# Altium PCB 门内主板.PcbDoc
Units mil, origin at the board's own origin, x right, y up, seen from the top; angles counter-clockwise.
Board outline 3940 x 3935 mil, 2 copper layers (Top Layer, Bottom Layer); 82 components, 98 nets, 427 pads, 219 vias.
Unrouted connection lines stored in the file: 51.
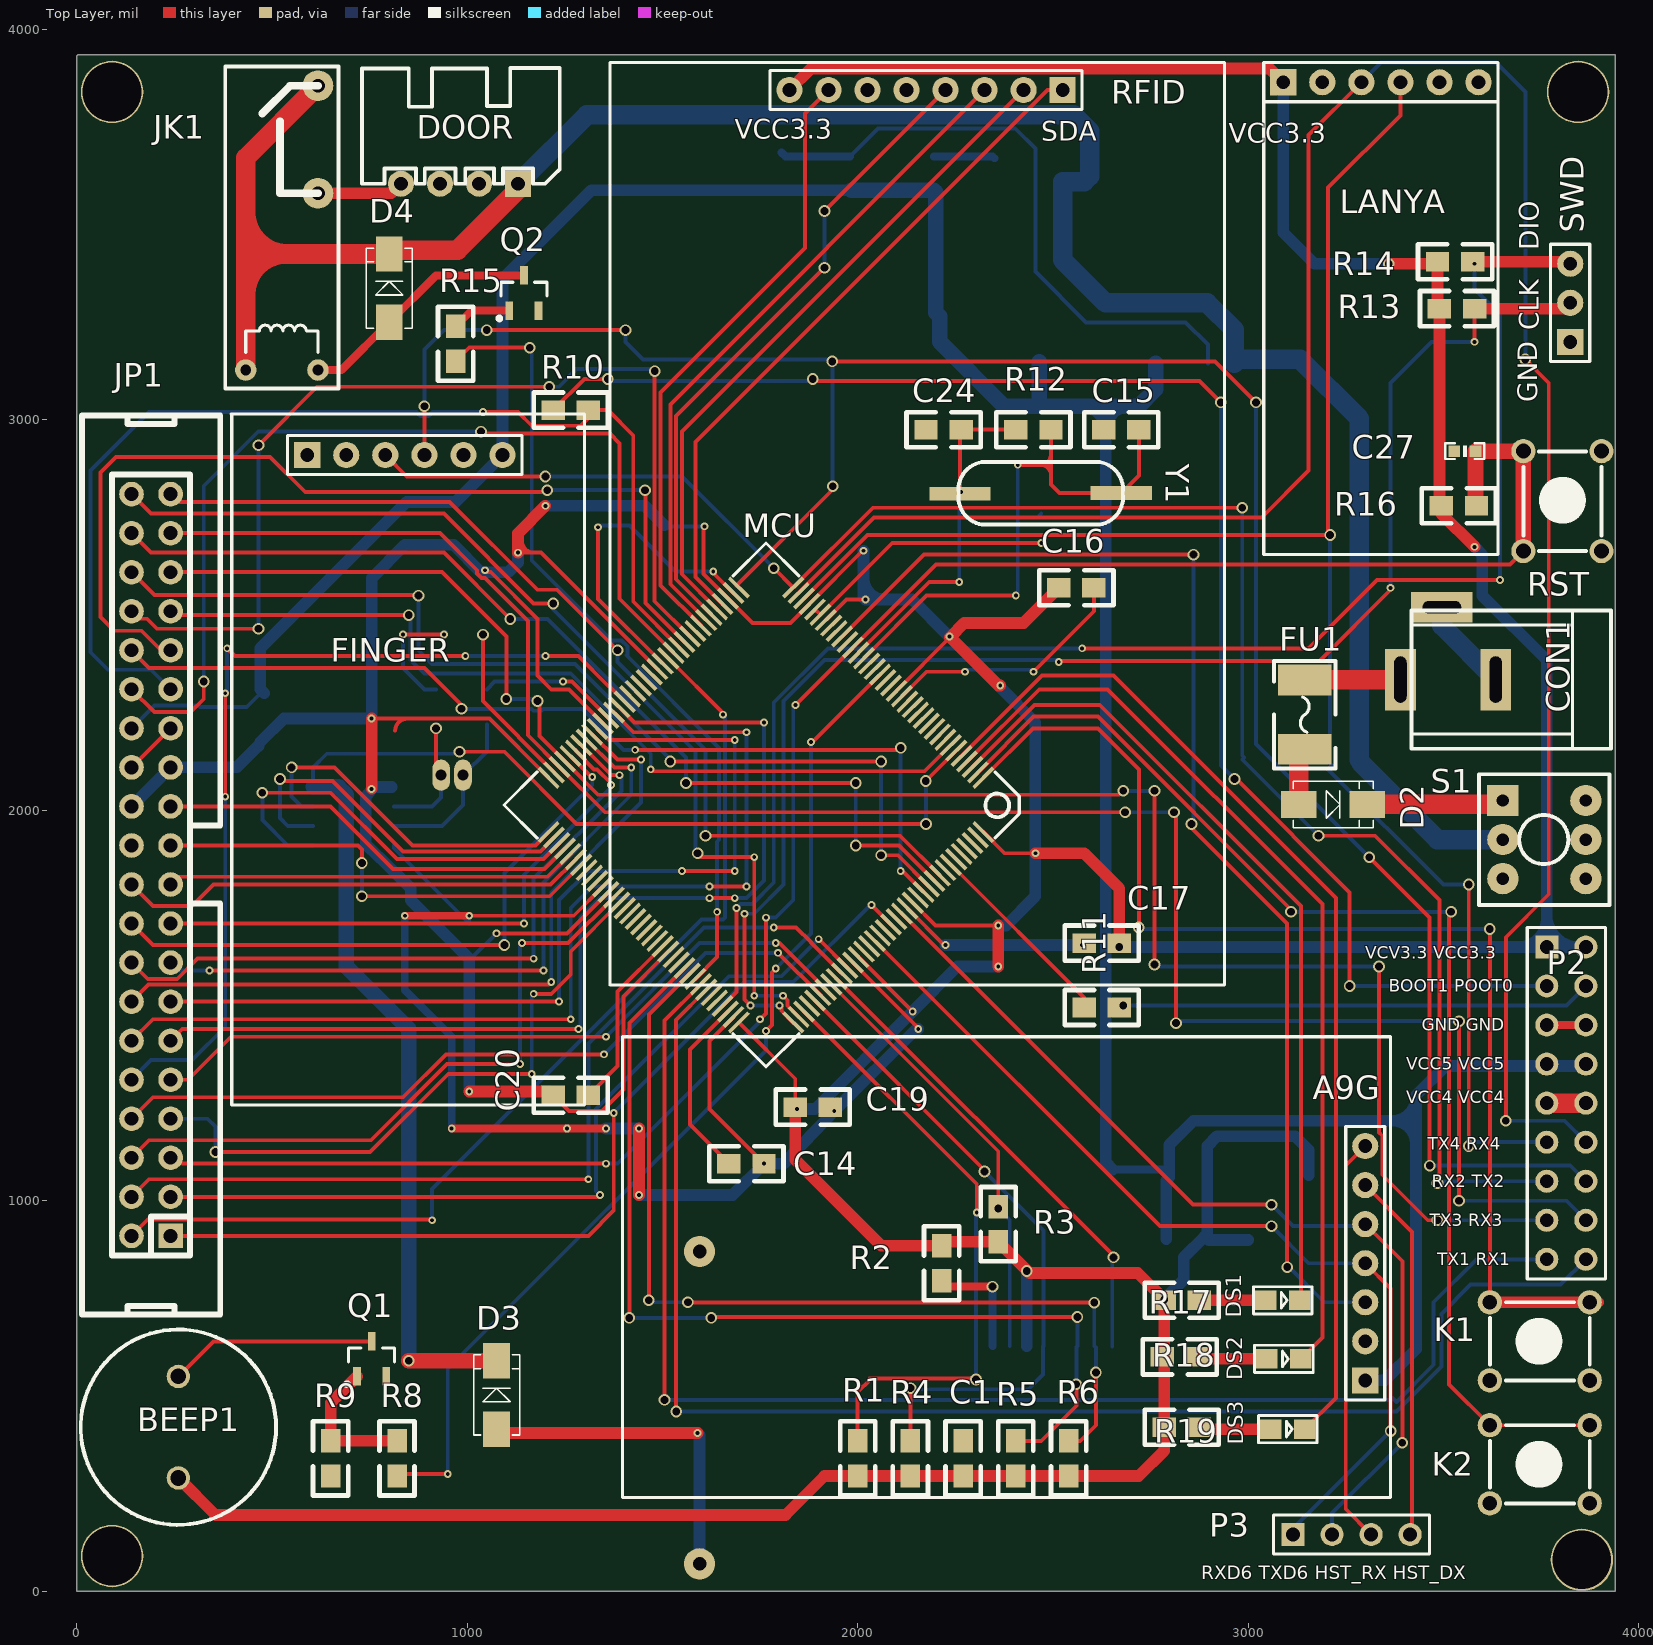
[diagram p0: Top Layer view]
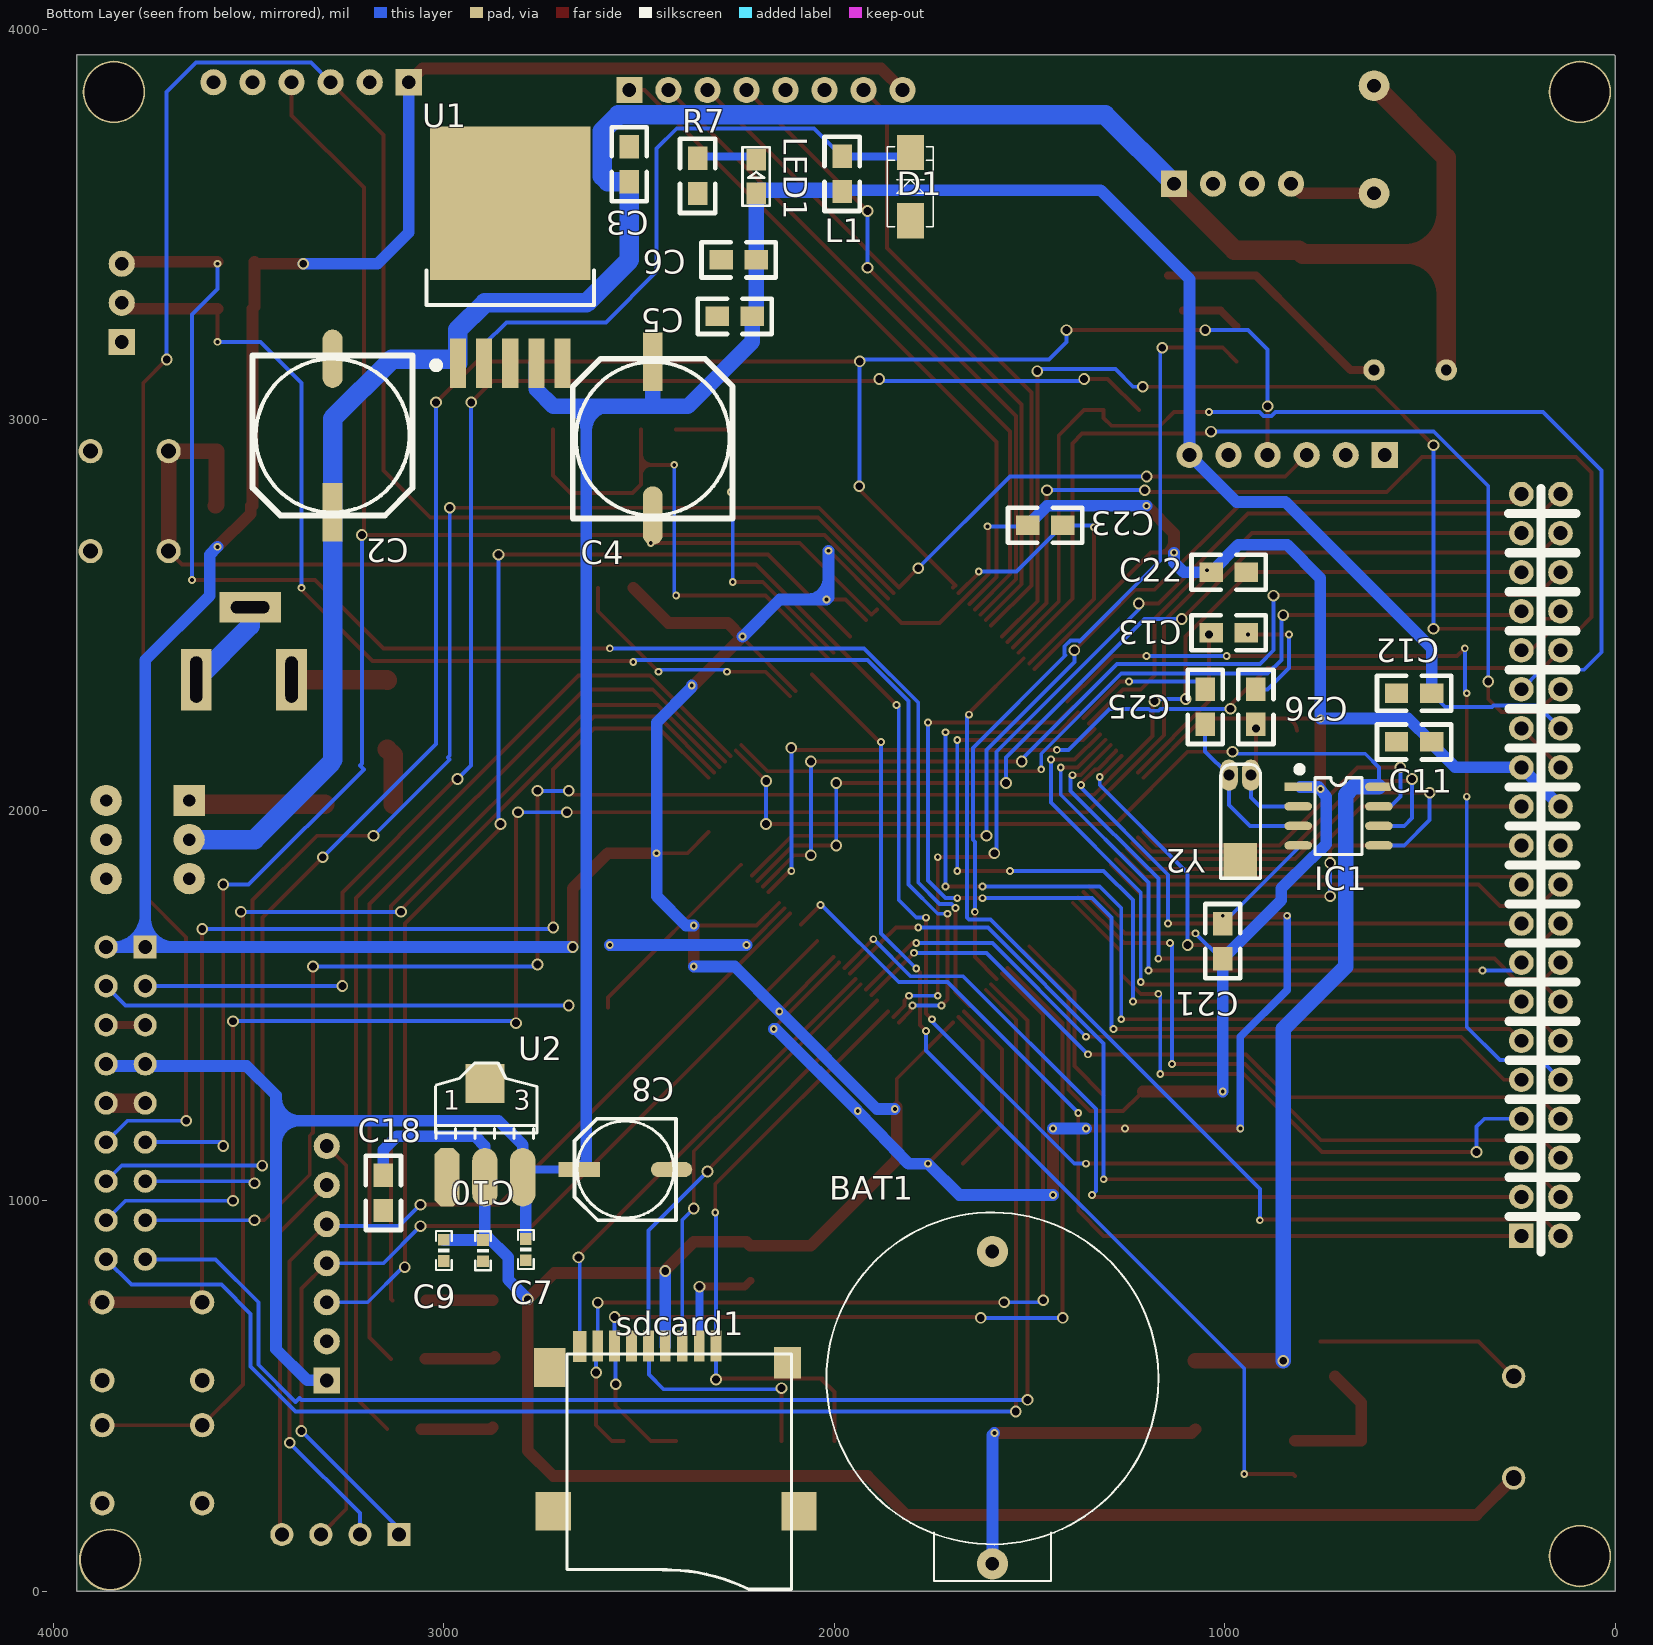
[diagram p1: Bottom Layer view, seen from below]

## Layer stack, top to bottom
Top Solder: solder mask 0.4, Solder Resist, Dk 3.5
Top Layer: signal copper 1.4
Dielectric 1: dielectric 12.6, FR-4, Dk 4.8
Bottom Layer: signal copper 1.4
Bottom Solder: solder mask 0.4, Solder Resist, Dk 3.5

## Board outline
0,0 0,3932.99 2.01,3935 3940,3935 3940,0

## Design rules (kind name [scope] priority, off if disabled: settings)
Clearance [All] p1: gap=5
PolygonConnect [All] p1: connectstyle=Relief reliefconductorwidth=10 reliefentries=4 polygonreliefangle="90 Angle" airgapwidth=10
RoutingVias [All] p1: holewidth=10 width=30 viastyle="Through Hole" minholewidth=2 minwidth=5 maxholewidth=30 maxwidth=50
SolderMaskExpansion [All] p1: expansion=4
Width [All] p1: maxlimit=50 minlimit=10 preferedwidth=30
30 further rules are at their usual default settings.

## Components (designator, comment, footprint, x,y, rotation, side; value= is the part's Value field where it differs from the comment)
A9G "Header 7" A9G 3365,240 r90 top locked
BAT1 "BATT" BATMAX 1595,470 r180 bottom locked
BEEP1 "BEEP" BUZZ 260,170 r90 top locked
C1 "104" 0805#1 2270.03,385 r270 top
C2 "470uF" "CM F(10*10.2)" 3285,2960 r270 bottom locked
C3 "104" 0805#2 2525,3700 r270 bottom
C4 "470uF" "CM F(10*10.2)" 2465,2951.85 r90 bottom
C5 "104" 0805#2 2300,3265 r180 bottom
C6 "104" 0805#2 2290,3410 r180 bottom
C7 "104" 0603P 2790,875 r270 bottom
C8 "100uF" "CM D(6.3*7.7)" 2535,1080 r0 bottom
C9 "22uF" 0603P 3000.06,872.5 r90 bottom
C10 "104" 0603P 2900,872 r90 bottom
C11 "104" 0805#1 470,2175 r0 bottom
C12 "104" 0805#1 560,2300.06 r180 bottom
C13 "2.2UF" 0805#2 1035,2455 r180 bottom
C14 "2.2UF" 0805#2 1670,1095 r0 top
C15 "20P" 0805#2 2720,2975 r180 top
C16 "104" 0805#2 2605,2570 r180 top
C17 "104" 0805#2 2580,1660 r0 top
C18 "104" 0805#2 3155,975 r90 bottom
C19 "104" 0805#2 1930,1240 r180 top
C20 "104" 0805#2 1310,1270 r180 top
C21 "104" 0805#2 1005,1710 r270 bottom
C22 "104" 0805#2 945,2610 r0 bottom
C23 "104" 0805#2 1415,2730 r0 bottom
C24 "20P" 0805#2 2265,2975 r180 top
C25 "104" 0805#2 1050,2310 r270 bottom
C26 "104" 0805#2 920,2310 r270 bottom
C27 "104" 0603P 3555,2920 r0 top
CON1 "5.5*2.1" DC-005 3634.09,2335 r0 top
D1 "1N5822" DIODE_3*5.3 1805,3600 r90 bottom
D2 "1N5822" DIODE_3*5.3 3220,2015 r0 top
D3 "1N5822" DIODE_3*5.3 1075,505 r90 top
D4 "1N5822" DIODE_3*5.3 800,3340 r90 top
DOOR "HDR-1X4" XH2.54-WI-4P 980,3605 r180 top
DS1 "LED2" SMDLED 3044.97,745.06 r0 top
DS2 "LED2" SMDLED 3047.96,595.06 r0 top
DS3 "LED2" SMDLED 3057.96,415.06 r0 top
FINGER "指纹模块" 指纹 395,3015 r270 top locked
FU1 "1A" "FU 1812" 3145,2245 r270 top
IC1 "DS1302" SOP8_N 708.35,1985 r180 bottom
JK1 "HF46F/5-HS1" HF46-xx-HS1 525,3490 r90 top
JP1 "Header 2X11" IDC2.54-LI-2x20P 240,910 r90 top locked
K1 "KEY_M" KEY_M 3875,540 r180 top
K2 "KEY_M" KEY_M 3875,225 r180 top
L1 "10uH" 0805#2 1980,3675 r270 bottom
LANYA "LANYA" 蓝牙 3090,3865 r0 top locked
LED1 "LED1" SMDLED 2200.06,3579.97 r90 bottom
MCU "STM32F407ZGT6" LQFP144 2321.65,2083.14 r225 top locked (schematic designator MCU1)
P2 "Header 9X2" HDR2X9 3765,1650 r270 top
P3 "Header 4" HDR1X4 3115,145 r0 top
Q1 "SS8050" SOT23-3N 755,595 r0 top
Q2 "S8050" SOT23-3N 1145,3325 r0 top
R1 "10K" 0805#1 2000,385 r270 top
R2 "10K" 0805#1 2214.94,795 r90 top
R3 "10K" 0805#1 2360,985 r270 top
R4 "10K" 0805#1 2135.02,385 r270 top
R5 "10K" 0805#1 2405.05,385 r270 top
R6 "10K" 0805#1 2540.06,385 r270 top
R7 "10K" 0805#2 2350,3580 r90 bottom
R8 "1K" 0805#2 820,295 r90 top
R9 "10K" 0805#2 650,295 r90 top
R10 "10K" 0805#1 1310,3024.94 r180 top
R11 "10K" 0805#2 2670,1495 r180 top
R12 "1M" 0805#2 2405,2975 r0 top
R13 "10K" 0805#2 3580,3285 r180 top
R14 "10K" 0805#2 3575,3405 r180 top
R15 "1K" 0805#2 970,3150 r90 top
R16 "10K" 0805#2 3585,2780 r180 top
R17 "510R" 0805#2 2785,745 r0 top
R18 "510R" 0805#2 2780,600 r0 top
R19 "510R" 0805#2 2785,420 r0 top
RFID "RFID" RFID 2940,3915 r270 top locked
RST "" KEY_M 3705,2664.09 r90 top (schematic designator RST1)
S1 "BUTTON" BTN8.5*8.5 3652.4,2025 r0 top
sdcard1 "sdIO-sdcard" sdcard_2 2270,505 r270 bottom locked
SWD "HDR-1X3" HDR2.54-LI-3P 3825,3300 r90 top (schematic designator SWD1)
U1 "LM2596S-5.0" TO263-5A 2830,3145 r180 bottom
U2 "AMS1117-3.3" AMS1117 2995.03,1060.06 r180 bottom
Y1 "8MHz" XTAL_T 2470,2810 r0 top
Y2 "32.768K" XTAL32 933,2090 r270 bottom

## Footprints (in the part's own frame and the unit in brackets; to place one, negate y for a bottom-side part, rotate by r counter-clockwise, add the part's x,y. Pads: shape width x height; smd on the part's side, far side on the other; paste and mask are expansions set on the pad)
0603P [mil]
  rect 30x30 smd: 1(-27,0) 2(27.5,-0.06)
  silkscreen extent -50,-20 50,20
0805#1 [mil]
  rect 60x50 smd: 1(0,-0.06) 2(90,-0.06)
  silkscreen extent -50,-45 140,45
0805#2 [mil]
  rect 60x50 smd: 1(0,0) 2(90,0)
  silkscreen extent -50,-45 140,45
A9G [mm] "30*50MM"
  rect 1.7x1.7 hole 0.9: 1(7.62,1.651)
  round 1.7 hole 0.9: 2(10.16,1.651) 3(12.7,1.651) 4(15.24,1.651) 5(17.78,1.651) 6(20.32,1.651) 7(22.86,1.651)
  silkscreen extent 0,0 29.97,49.97, body extent 6.35,0.38 24.13,2.92, height 8.5
AMS1117 [mil]
  oct 65x150 smd: 1(3,0)
  oval 65x150 smd: 2(100.03,-0.06) 3(197,0)
  rect 100x100 smd: 4(100.03,239.94)
  silkscreen extent -26,100 234,293
BATMAX [mil]
  round 80 hole 35: 1(0,-400) 2(0,400)
  silkscreen extent -425,-444 425,500
BTN8.5*8.5 [mil]
  rect 80x80 hole 31.5: 1(0,0)
  round 80 hole 31.5: 2(0,-100) 3(0,-200) 4(212.6,-200) 5(212.6,-100) 6(212.6,0)
  silkscreen extent -61,-267 274,67
BUZZ [mil]
  round 60 hole 40: 1(120,0) 2(380,0)
  silkscreen extent 0,-250 500,250
"CM D(6.3*7.7)" [mm] "贴片电解电容，直径6.3mm，高7.7mm"
  rect 2.7x1 smd: 1(3,0)
  oval 2.7x1 smd: 2(-3,0)
  silkscreen extent -3.3,-3.3 3.3,3.3, body extent -3.5,-3.3 3.5,3.3, height 7.7
"CM F(10*10.2)" [mm]
  rect 3.8x1.3 smd: 1(5,0)
  oval 3.8x1.3 smd: 2(-5,0)
  silkscreen extent -5.2,-5.2 5.2,5.2, body extent -5.8,-5.15 5.8,5.15, height 10.2
DC-005 [mm]
  rect 2x4 hole 0.8 slot 3 at 90 deg: 1(-6.2,0) 2(0,0)
  rect 4x2 hole 0.8 slot 2.5 at 0 deg: 3(-3.5,4.7)
  silkscreen extent -5.48,-4.5 7.5,4.5, body extent -6.55,-4.5 7.5,4.8, height 11.2
DIODE_3*5.3 [mm]
  rect 2.3x1.75 smd: 1(-2.286,0) 2(2.159,0)
  silkscreen extent -2.67,-1.5 2.54,1.5
"FU 1812" [mm] "贴片保险丝"
  rect 2x3.5 smd: 1(-2.25,0) 2(2.25,0)
  silkscreen extent -3.5,-2 3.5,2, body extent -2.3,-1.61 2.3,1.61, height 0.87
HDR1X4 [mm] "Connector; Header; 4 Position"
  rect 1.5x1.5 hole 0.9: 1(0,0)
  round 1.5 hole 0.9: 2(2.54,0) 3(5.08,0) 4(7.62,0)
  silkscreen extent -1.27,-1.27 8.89,1.27
HDR2.54-LI-3P [mm]
  rect 1.7x1.7 hole 0.9: 1(-2.54,0)
  round 1.7 hole 0.9: 2(0,0) 3(2.54,0)
  silkscreen extent -3.81,-1.27 3.81,1.27, body extent -3.81,-1.27 3.81,1.27, height 8.5
HDR2X9 [mm] "Connector; Header; 9x2 Position"
  rect 1.5x1.5 hole 0.9: 1(0,0)
  round 1.5 hole 0.9: 2(0,2.54) 3(2.54,0) 4(2.54,2.54) 5(5.08,0) 6(5.08,2.54) 7(7.62,0) 8(7.62,2.54) 9(10.16,0) 10(10.16,2.54) 11(12.7,0) 12(12.7,2.54) 13(15.24,0) 14(15.24,2.54) 15(17.78,0) 16(17.78,2.54) 17(20.32,0) 18(20.32,2.54)
  silkscreen extent -1.27,-1.27 21.59,3.81
HF46-xx-HS1 [mm] "一组常开，长：20.5mm，宽：7mm，高：15.3mm"
  round 1.4 hole 0.7: 1(-9.2,2.35) 2(-9.2,-2.35)
  round 2 hole 0.9: 3(2.3,-2.35) 4(9.3,-2.35)
  silkscreen extent -10.41,-3.68 10.54,3.68, body extent -10.25,-3.5 10.25,3.5, height 15.3
IDC2.54-LI-2x20P [mm] "40P简易牛角座"
  rect 1.6x1.6 hole 0.9: 1(0,0)
  round 1.6 hole 0.9: 2(0,2.54) 3(2.54,0) 4(2.54,2.54) 5(5.08,0) 6(5.08,2.54) 7(7.62,0) 8(7.62,2.54) 9(10.16,0) 10(10.16,2.54) 11(12.7,0) 12(12.7,2.54) 13(15.24,0) 14(15.24,2.54) 15(17.78,0) 16(17.78,2.54) 17(20.32,0) 18(20.32,2.54) 19(22.86,0) 20(22.86,2.54) 21(25.4,0) 22(25.4,2.54) 23(27.94,0) 24(27.94,2.54) 25(30.48,0) 26(30.48,2.54) 27(33.02,0) 28(33.02,2.54) 29(35.56,0) 30(35.56,2.54) 31(38.1,0) 32(38.1,2.54) 33(40.64,0) 34(40.64,2.54) 35(43.18,0) 36(43.18,2.54) 37(45.72,0) 38(45.72,2.54) 39(48.26,0) 40(48.26,2.54)
  silkscreen extent -5.11,-3.23 53.37,5.77, body extent -5.08,-3.08 53.34,5.77, height 9.17
KEY_M [mil]
  round 62 hole 38: 1(0,0) 1(255.91,0) 2(0,-200) 2(255.91,-200)
  silkscreen extent 0,-200 255,0
LQFP144 [mil]
  rect 70.87x10 smd: 1(-0.35,0.02) 2(-0.35,-19.66) 3(-0.35,-39.35) 4(-0.35,-59.03) 5(-0.35,-78.72) 6(-0.35,-98.4) 7(-0.35,-118.09) 8(-0.35,-137.77) 9(-0.35,-157.46) 10(-0.35,-177.14) 11(-0.35,-196.83) 12(-0.35,-216.51) 13(-0.35,-236.2) 14(-0.35,-255.88) 15(-0.35,-275.57) 16(-0.35,-295.25) 17(-0.35,-314.94) 18(-0.35,-334.62) 19(-0.35,-354.31) 20(-0.35,-373.99) 21(-0.35,-393.68) 22(-0.35,-413.36) 23(-0.35,-433.05) 24(-0.35,-452.73) 25(-0.35,-472.42) 26(-0.35,-492.1) 27(-0.35,-511.79) 28(-0.35,-531.47) 29(-0.35,-551.16) 30(-0.35,-570.84) 31(-0.35,-590.53) 32(-0.35,-610.21) 33(-0.35,-629.9) 34(-0.35,-649.58) 35(-0.35,-669.27) 36(-0.35,-688.95) 73(885.47,-688.95) 74(885.47,-669.27) 75(885.47,-649.58) 76(885.47,-629.9) 77(885.47,-610.21) 78(885.47,-590.53) 79(885.47,-570.84) 80(885.47,-551.16) 81(885.47,-531.47) 82(885.47,-511.79) 83(885.47,-492.1) 84(885.47,-472.42) 85(885.47,-452.73) 86(885.47,-433.05) 87(885.47,-413.36) 88(885.47,-393.68) 89(885.47,-373.99) 90(885.47,-354.31) 91(885.47,-334.62) 92(885.47,-314.94) 93(885.47,-295.25) 94(885.47,-275.57) 95(885.47,-255.88) 96(885.47,-236.2) 97(885.47,-216.51) 98(885.47,-196.83) 99(885.47,-177.14) 100(885.47,-157.46) 101(885.47,-137.77) 102(885.47,-118.09) 103(885.47,-98.4) 104(885.47,-78.72) 105(885.47,-59.03) 106(885.47,-39.35) 107(885.47,-19.66) 108(885.47,0.02)
  rect 10x70.87 smd: 37(98.07,-787.38) 38(117.76,-787.38) 39(137.44,-787.38) 40(157.13,-787.38) 41(176.81,-787.38) 42(196.5,-787.38) 43(216.18,-787.38) 44(235.87,-787.38) 45(255.55,-787.38) 46(275.24,-787.38) 47(294.92,-787.38) 48(314.61,-787.38) 49(334.29,-787.38) 50(353.98,-787.38) 51(373.66,-787.38) 52(393.35,-787.38) 53(413.03,-787.38) 54(432.72,-787.38) 55(452.4,-787.38) 56(472.09,-787.38) 57(491.77,-787.38) 58(511.46,-787.38) 59(531.14,-787.38) 60(550.83,-787.38) 61(570.51,-787.38) 62(590.2,-787.38) 63(609.88,-787.38) 64(629.57,-787.38) 65(649.25,-787.38) 66(668.94,-787.38) 67(688.62,-787.38) 68(708.31,-787.38) 69(727.99,-787.38) 70(747.68,-787.38) 71(767.36,-787.38) 72(787.05,-787.38) 109(787.05,98.45) 110(767.36,98.45) 111(747.68,98.45) 112(727.99,98.45) 113(708.31,98.45) 114(688.62,98.45) 115(668.94,98.45) 116(649.25,98.45) 117(629.57,98.45) 118(609.88,98.45) 119(590.2,98.45) 120(570.51,98.45) 121(550.83,98.45) 122(531.14,98.45) 123(511.46,98.45) 124(491.77,98.45) 125(472.09,98.45) 126(452.4,98.45) 127(432.72,98.45) 128(413.03,98.45) 129(393.35,98.45) 130(373.66,98.45) 131(353.98,98.45) 132(334.29,98.45) 133(314.61,98.45) 134(294.92,98.45) 135(275.24,98.45) 136(255.55,98.45) 137(235.87,98.45) 138(216.18,98.45) 139(196.5,98.45) 140(176.81,98.45) 141(157.13,98.45) 142(137.44,98.45) 143(117.76,98.45) 144(98.07,98.45)
  silkscreen extent -32,-819 917,130
RFID [mm] "60*40MM"
  rect 1.7x1.7 hole 0.9: 1(1.778,-10.541)
  round 1.7 hole 0.9: 2(1.778,-13.081) 3(1.778,-15.621) 4(1.778,-18.161) 5(1.778,-20.701) 6(1.778,-23.241) 7(1.778,-25.781) 8(1.778,-28.321)
  silkscreen extent 0,-40 60,0, body extent 0.51,-29.59 3.05,-9.27, height 8.5
sdcard_2 [mil]
  rect 80x27.56 smd: 1(-122.67,-32.8) 2(-122.67,-76.11) 3(-122.67,-119.42) 4(-122.67,-162.72) 5(-122.67,-206.03) 6(-122.67,-249.34) 7(-122.67,-292.64) 8(-122.67,-335.95)
  rect 80x33.46 smd: 9(-122,-382)
  rect 98.43x90 smd: 10(300,180) 11(300,-450)
  rect 80x70 smd: 12(-80,150)
  rect 100x80 smd: 13(-68,-459)
  silkscreen extent -102,-415 500,160
SMDLED [mm]
  rect 1.4x1.27 smd: 1(0.001,-0.002) 2(2.211,-0.002)
  silkscreen extent -0.8,-0.89 3.01,0.89
SOP8_N [mm] "5*6*1.8mm（长宽高）"
  rect 1.8x0.55 smd: 1(-2.625,1.905)
  oval 1.8x0.55 smd: 2(-2.625,0.635) 3(-2.625,-0.635) 4(-2.625,-1.905) 5(2.625,-1.905) 6(2.625,-0.635) 7(2.625,0.635) 8(2.625,1.905)
  silkscreen extent -2.69,-2.5 1.52,3.2, body extent -3,-2.5 3,2.5, height 1.9
SOT23-3N [mm] "3x1.3x1mm(长宽高)"
  rect 0.5x1.2 smd: 1(-0.95,-1.143) 2(0.95,-1.143) 3(0,1.143)
  silkscreen extent -1.72,-1.78 1.5,0.7, body extent -1.5,-1.2 1.5,1.2, height 1.05
TO263-5A [mm] "263，5脚晶体管"
  rect 1.05x3.2 smd: 1(-3.4,0) 2(-1.7,0) 3(0,0) 4(1.7,0) 5(3.4,0)
  rect 10.45x10 smd: 3(0,10.414)
  silkscreen extent -5.46,-0.33 5.46,6.04, body extent -5,-0.01 5,13.32, height 4.5
XH2.54-WI-4P [mm] "接插件，4P"
  rect 1.7x1.7 hole 0.9: 1(-3.81,0)
  round 1.7 hole 0.9: 2(-1.27,0) 3(1.27,0) 4(3.81,0)
  silkscreen extent -6.53,-7.53 6.35,0, body extent -6.31,-7.35 6.31,0.35, height 5.73
XTAL32 [mil]
  oval 80x45 hole 28: 1(0,0) 2(0,-56)
  rect 92.13x86 smd: ""(220,-27)
  silkscreen extent -28,-77 264,25
XTAL_T [mm]
  rect 4x0.9 smd: 1(-5.283,0.027) 2(5.217,0.077)
  silkscreen extent -5.38,-1.98 5.32,2.08
指纹 [mm] "45*23mm"
  rect 1.7x1.7 hole 0.9: 1(2.667,4.953)
  round 1.7 hole 0.9: 2(2.667,7.493) 3(2.667,10.033) 4(2.667,12.573) 5(2.667,15.113) 6(2.667,17.653)
  silkscreen extent 0,0 44.96,22.99, body extent 1.4,3.68 3.94,18.92, height 8.5
蓝牙 [mm] "32*15mm"
  rect 1.7x1.7 hole 0.9: 1(0,0)
  round 1.7 hole 0.9: 2(2.54,0) 3(5.08,0) 4(7.62,0) 5(10.16,0) 6(12.7,0)
  silkscreen extent -1.27,-30.73 13.97,1.27, body extent -1.27,-1.27 13.97,1.27, height 8.5

## Part data
A9G: "Header, 7-Pin"
BAT1: library part BAT
C1 C3 C5 C6 C7 C8 C9 C10 C11 C12 C25 C26 C27: library part C
C2 C4: library part CAP
C13 C14: library part C_1
C15 C16 C17 C18 C19 C20 C21 C22 C23 C24: library part C, "无极性贴片电容"
CON1: library part P-DC, "低压电源接口"
D1 D2 D3 D4: library part 1N4148, "高速开关二极管"
DOOR: library part "Header 4", "4P接插件"
DS1 DS2 DS3: "Typical RED, GREEN, YELLOW, AMBER GaAs LED"
FU1: library part FU, "贴片保险丝"
IC1: "实时时钟芯片"
JK1: "5V一组常开"
JP1: library part "Header 20X2", "20*2P接插件"
L1: library part L, "小功率贴片电感"
LANYA: library part 蓝牙模块
LED1: library part LED2, "Typical RED, GREEN, YELLOW, AMBER GaAs LED"
P2: "Header, 9-Pin, Dual row"
P3: "Header, 4-Pin"
Q1 Q2: library part 8050-SMD, "高频放大-NPN型"
R1 R2 R3 R4 R5 R6 R7 R10 R11 R12 R13 R14 R15 R16 R17 R18 R19: library part R
R8 R9: library part R, "贴片电阻"
RFID: library part RC522
RST: library part KEY_M
SWD: library part "Header 3", "3P接插件"
U1: library part Component_1, "LM2576S-5.0"
U2: library part AMS1117
Y1: library part XTAL_2, "Crystal Oscillator"
Y2: library part XTAL_1, "Crystal Oscillator"

## Free pads (board coordinates)
  round 160 hole 150: 0(90,3840) 1(3845,3840) 2(3855,80) 3(90,90)

## Via types
v1: diameter 20, hole 10, Top Layer to Bottom Layer, 113 vias
v2: diameter 30, hole 20, Top Layer to Bottom Layer, 106 vias

## Nets (pads, with @x,y where several pads share a name; then routed paths per layer and width w, separated by ;. In a path a pad name is that pad's centre, name@x,y a point inside that pad or via, vN(x,y) a via of type N, cw(c..) or ccw(c..) an arc to the next point about the centre after c; other vN are vias at no path point)
BOOT0: MCU.138 R11.2 | length 507.9
  Top Layer w10: MCU.138 2239.7,1860.66 2580,1520.36 R11.2
BOOT1: JP1.29 MCU.48 R10.1 | length 2830.7
  Top Layer w10: v1(1040,3020) 1130,3020 1165,2985 1290,2985 1310,3005 R10.1 1360,3025 1425,2960 1425,2534.87 MCU.48
  Bottom Layer w10: JP1.29 190,2360 80,2360 35,2405 35,2870 185,3020 869.64,3020 879.64,3010 900.36,3010 910.36,3020 v1(1040,3020)
FSMC_A6: JP1.2 MCU.50 | length 2630.5
  Top Layer w10: JP1.2 181.5,951.5 908.5,951.5 v1(910,950) ; MCU.50 1655,2249.19 v1(1655,2245)
  Bottom Layer w10: v1(910,950) 910,1030 1600,1720 1655,1720 1660,1725 1660,2240 v1(1655,2245)
FSMC_D0: JP1.6 MCU.85 | length 1690.4
  Top Layer w10: JP1.6 185,1155 753.26,1155 948.26,1350 v1(1135,1350) ; v1(1140,1660) 1258.26,1660 MCU.85
  Bottom Layer w10: v1(1135,1350) 1135,1655 v1(1140,1660)
FSMC_D1: JP1.7 MCU.86 | length 1638.6
  Top Layer w10: v2(355,1125) 751.1,1125 951.1,1325 v1(1165,1325) ; v1(1170,1530) 1215,1530 1265,1580 1265,1638.9 MCU.86
  Bottom Layer w10: JP1.7 335,1210 355,1190 v2(355,1125) ; v1(1165,1325) 1165,1525 v1(1170,1530)
FSMC_D2: JP1.8 MCU.114 | length 1985.3
  Top Layer w10: JP1.8 195,1265 835,1265 945,1375 v1(1350,1375) ; v1(1795.93,1635) MCU.114
  Bottom Layer w10: v1(1350,1375) 1610,1635 v1(1795.93,1635)
FSMC_D3: JP1.9 MCU.115 | length 1878
  Top Layer w10: JP1.9 285,1310 395,1420 v1(1355,1420) ; v1@1790,1665 v1(1790,1660) 1799.22,1660 1918.26,1540.96 MCU.115
  Bottom Layer w10: v1(1355,1420) 1595,1660 v1(1790,1660)
FSMC_D4: JP1.10 MCU.58 | length 2342.9
  Top Layer w10: v1(380,2035) v1(380,2300) ; v1(385,2415) 405,2395 v1(995,2395) ; v1(1200,2395) 1285,2395 1361.12,2318.88 1362.6,2318.88 MCU.58
  Bottom Layer w10: JP1.10 190,1360 295,1360 380,1445 v1(380,2035) ; v1(380,2300) 385,2305 v1(385,2415) ; v1(995,2395) v1(1200,2395)
FSMC_D5: JP1.11 MCU.59 | length 2645.8
  Top Layer w10: JP1.11 270,1440 v1(1285,1440) ; MCU.59 1428.64,2225 v1(1760,2225) ; v1(1620,1775) v1(1685,1775)
  Bottom Layer w10: v1(1285,1440) 1290,1445 1290,1725 1340,1775 v1(1620,1775) ; v1(1685,1775) 1715,1775 1760,1820 v1(1760,2225)
FSMC_D6: JP1.12 MCU.60 | length 2661
  Top Layer w10: JP1.12 195,1465 v1(1265,1465) ; MCU.60 1425.81,2200 v1(1715,2200) ; v1(1620,1805) v1(1715,1805)
  Bottom Layer w10: v1(1265,1465) 1265,1750 1320,1805 v1(1620,1805) ; v1(1715,1805) v1(1715,2200)
FSMC_D7: JP1.13 MCU.63 | length 2434.3
  Top Layer w10: JP1.13 v1(1235,1510) ; MCU.63 1362.29,2180 v1(1685,2180) ; v1(1550,1845) v1(1685,1845)
  Bottom Layer w10: v1(1235,1510) 1235,1770 1310,1845 v1(1550,1845) ; v1(1685,1845) v1(1685,2180)
FSMC_D8: JP1.14 MCU.64 | length 1913.1
  Top Layer w10: JP1.14 183.5,1553.5 1208.5,1553.5 v1(1215,1560) ; MCU.64 1384.45,2130 v1(1445,2130)
  Bottom Layer w10: v1(1215,1560) 1215,1790 1445,2020 v1(1445,2130)
FSMC_D9: JP1.15 MCU.65 | length 1720
  Top Layer w10: v1(340,1590) v1(1195,1590) ; MCU.65 1376.61,2110 v1(1420,2110)
  Bottom Layer w10: JP1.15 260,1590 v1(340,1590) ; v1(1195,1590) 1195,1815 1420,2040 v1(1420,2110)
FSMC_D10: JP1.16 MCU.66 | length 1763.7
  Top Layer w10: JP1.16 181.5,1568.5 257.19,1568.5 308.68,1620 v1(1170,1620) ; MCU.66 1368.77,2090 v1(1390,2090)
  Bottom Layer w10: v1(1170,1620) 1170,1825 1395,2050 1395,2085 v1(1390,2090)
FSMC_D11: JP1.17 MCU.67 | length 1482.3
  Top Layer w10: JP1.17 v1(1145,1710) ; MCU.67 1277.97,2152.03 1325,2105 1332.56,2105 1368.28,2069.28 v1(1368.28,2065)
  Bottom Layer w10: v1(1145,1710) 1145,1835 1368.28,2058.28 v1(1368.28,2065)
FSMC_D12: JP1.18 MCU.68 | length 1589.3
  Top Layer w10: JP1.18@130,1710 JP1.18 195,1655 v2(1095,1655) ; MCU.68 1318.1,2085 v1(1320,2085)
  Bottom Layer w10: v2(1095,1655) 1095,1840 1320,2065 v1(1320,2085)
FSMC_D13: JP1.19 MCU.77 | length 1056.6
  Top Layer w10: JP1.19 260,1830 1205.55,1830 MCU.77
FSMC_D14: JP1.20 MCU.78 | length 1210.3
  Top Layer w10: JP1.20 195,1755 295,1755 350,1810 1213.39,1810 MCU.78
FSMC_D15: JP1.21 MCU.79 | length 1209.4
  Top Layer w10: JP1.21 720,1910 730,1900 v2(730,1865) ; v2(730,1780) 1211.23,1780 MCU.79
  Bottom Layer w10: v2(730,1780) v2(730,1865)
FSMC_NE4: JP1.1 MCU.127 | length 2363.8
  Top Layer w10: JP1.1 1310,910 1375,975 v1(1375,1225) ; v1(2035,1757.84) MCU.127
  Bottom Layer w10: v1(1375,1225) 1710,1560 1835,1560 2032.84,1757.84 v1(2035,1757.84)
FSMC_NOE: JP1.4 MCU.118 | length 2358.9
  Top Layer w10: JP1.4 185,1055 v1(1310,1055) ; v1(1785,1700) 1842.29,1700 1880,1662.29 1880,1661.72 1959.44,1582.27 MCU.118
  Bottom Layer w10: v1(1310,1055) 1310,1403.28 1606.72,1700 v1(1785,1700)
FSMC_NWE: JP1.3 MCU.119 | length 2180.9
  Top Layer w10: JP1.3 1335,1010 v1(1340,1015) ; v1(1900,1670) 1900.13,1670 MCU.119
  Bottom Layer w10: v1(1340,1015) 1330,1025 1330,1235 1670,1575 1805,1575 v1(1900,1670)
GND: A9G.2 BAT1.2 C1.1 C2.2 C3.1 C4.2 C5.1 C6.1 C7.2 C8.2 C9.1 C10.1 C11.2 C12.1 C13.2 C14.2 C15.2 C16.1 C17.1 C18.1 C19.1 C20.1 C21.1 C22.1 C23.1 C24.2 C25.1 C26.1 C27.1 CON1.2 CON1.3 D1.1 DOOR.2 DOOR.3 FINGER.5 IC1.4 JP1.22 JP1.26 JP1.27 K1.1 K2.1 LANYA.2 MCU.16 MCU.31 MCU.32 MCU.38 MCU.51 MCU.61 MCU.83 MCU.94 MCU.107 MCU.120 MCU.130 P2.5 P2.6 Q1.2 Q2.2 R7.1 R9.1 RFID.6 RST.2 sdcard1.6 SWD.1 U1.3 U1.5 U2.1 | length 7937.1
  Top Layer w10: JP1.26 JP1.27 ; v1(835,2450) v1(940,2450) ; v1(1005,1730) 1272.58,1730 MCU.83 ; v1(1245,2330) 1267.97,2330 MCU.61 ; C20.1 1385,1345 1385,1536.19 MCU.94 ; v1(1335,2725) 1335,2541.36 MCU.51 ; v1(1630,2611.63) 1630,2608.26 MCU.38 ; MCU.107 1620,1409.29 1620,1235 v1(1760,1095) ; MCU.32 MCU.31 2088.39,2685 v1(2470,2685) ; v1(1940,1230) C19.1@1940,1235 ; MCU.120 1987.86,1609.67 2132.52,1465 2132.97,1465 2155,1442.97 v1(2155,1440) ; MCU.16 2175.97,2355 v1(2275,2355) ; MCU.130 2221.36,1655 v1(2225,1655) ; v1(2450,2355) 2605,2510 C16.1 ; v1(2575,1655) C17.1
  Top Layer w20: v1(840,1730) v1(1005,1730) ; v1(960,1185) v1(1255,1185) v1(1355,1185) ; P2.5 P2.6
  Top Layer w30: v1(1440,1015) v1(1440,1185)
  Bottom Layer w10: IC1.4 811.69,1903.31 C21.1 v1(1005,1730) ; v1(835,2450) 835,2365 890,2310 C26.1 ; v1(940,2450) C13.2 ; C25.1 1070,2330 v1(1245,2330) ; v1(1335,2725) 1340,2730 C23.1 1533.37,2611.63 v1(1630,2611.63) ; v1(2275,2355) 2280,2360 2445,2360 v1(2450,2355) ; C4.2 C4.2@2470,2760
  Bottom Layer w20: v1(840,1730) 840,1540 960,1420 v1(960,1185)
  Bottom Layer w30: v1(1355,1185) v1(1440,1185) ; v1(1440,1015) 1680,1015 v1(1760,1095) 1810,1095 v1(1940,1230) 2150,1440 v1(2155,1440) ; v1(2225,1655) v1(2575,1655)
  Bottom Layer w50: CON1.3 3496.3,2472.8 CON1.2
HST_RXD: A9G.6 P3.4 | length 944.7
  Top Layer w10: A9G.6 3420,920 P3.4@3420,145
HST_TXD: A9G.7 P3.3 | length 1042.6
  Top Layer w10: A9G.7 3250,1090 3250,210 P3.3
KEY1: K1.2 MCU.1 | length 3011.6
  Top Layer w10: MCU.1 2448.55,2210 2615,2210 2720,2105 v2(2720,1700) ; K1.2@3619.09,740 v2(3619.09,1695.91)
  Top Layer w30: K1.2@3640,740 3875,740 K1.2@3895.91,740
  Bottom Layer w10: v2(2720,1700) 2724.09,1695.91 v2(3619.09,1695.91)
KEY2: K2.2 MCU.2 | length 3097.4
  Top Layer w10: MCU.2 2450.71,2240 2615.36,2240 3110,1745.36 v2(3110,1740) ; v2(3520,1740) 3515,1735 3515,529.09 3619.09,425 K2.2@3875,425
  Bottom Layer w10: v2(3110,1740) v2(3520,1740)
LCD_BL: JP1.23 MCU.76 | length 1098.1
  Top Layer w10: JP1.23 650,2010 810,1850 1197.71,1850 MCU.76
LED1: DS1.2 MCU.3 | length 2131.2
  Top Layer w10: MCU.3 2452.87,2270 2620,2270 3135,1755 3135,747.99 DS1.2
LED2: DS2.2 MCU.4 | length 2402
  Top Layer w10: MCU.4 2465.04,2310 2640,2310 3190,1760 3190,650 DS2.2
LED3: DS3.2 MCU.5 | length 2673.3
  Top Layer w10: MCU.5 2472.2,2345 2655,2345 3225,1775 3225,495 DS3.2
NetBAT1_1: BAT1.1 D3.1 | length 856.2
  Top Layer w30: D3.1 1085,405 v1(1590,405)
  Bottom Layer w30: v1(1590,405) 1595,400 BAT1.1
NetBEEP1_2: BEEP1.2 Q1.3 | length 532.3
  Top Layer w10: BEEP1.2 350,640 Q1.3
NetC13_1: C13.1 MCU.71 | length 435.3
  Top Layer w10: v2(1040,2450) 1040,2279.58 MCU.71
  Bottom Layer w10: C13.1 v2(1040,2450)
NetC14_1: C14.1 MCU.106 | length 471.7
  Top Layer w10: MCU.106 1570,1387.13 1570,1195 C14.1
NetC25_2: C25.2 IC1.3 Y2.2 | length 430.9
  Bottom Layer w10: IC1.3 935,1960 989,2014 Y2.2 1050,2151 C25.2
NetC26_2: C26.2 IC1.2 Y2.1 | length 323.2
  Top Layer w10: v2(920,2210) 920,2103 Y2.1
  Bottom Layer w10: IC1.2 910,2010 933,2033 Y2.1 ; v2(920,2210) C26.2
NetCON1_1: CON1.1 FU1.1 | length 245.6
  Top Layer w50: FU1.1 3146.42,2335 CON1.1
NetD1_2: D1.2 L1.1 U1.2 | length 1587.6
  Bottom Layer w10: L1.1 2051.54,3746.54 2403.46,3746.54 2455,3695 2455,3380 2585,3250 2840,3250 2896.93,3193.07 U1.2
  Bottom Layer w20: D1.2 1815,3675 L1.1
NetD2_1: D2.1 FU1.2 | length 147.6
  Top Layer w50: D2.1 3130,2141.42 FU1.2
NetD2_2: D2.2 S1.1 | length 358.3
  Top Layer w50: D2.2 3635,2015 S1.1@3655,2035
NetD4_1: D4.1 JK1.2 Q2.3 | length 627.8
  Top Layer w20: JK1.2 677.8,3127.8 D4.1 920,3370 Q2.3
NetDOOR_4: DOOR.4 JK1.3 | length 222.6
  Top Layer w30: JK1.3 805.55,3580.55 DOOR.4
NetDS1_1: DS1.1 R17.2 | length 170
  Top Layer w30: R17.2 DS1.1
NetDS2_1: DS2.1 R18.2 | length 180.1
  Top Layer w30: R18.2 2875,595 DS2.1
NetDS3_1: DS3.1 R19.2 | length 185.1
  Top Layer w30: R19.2 2880,415 DS3.1
NetLED1_2: LED1.2 R7.2 | length 157.1
  Bottom Layer w20: LED1.2@2195,3675 2345,3675 R7.2
NetMCU_20: MCU.20 R8.1 | length 2641.3
  Top Layer w10: R8.1 825,300 v1(950,300) ; v1(1765,1435) 1780,1450 1780,1585 v1(1790,1595) ; v1(1880,2175) 1884.61,2175 MCU.20
  Bottom Layer w10: v1(950,300) 950,570 1765,1385 v1(1765,1435) ; v1(1790,1595) 1880,1685 v1(1880,2175)
NetP2_3: P2.3 R10.2 | length 3911.8
  Top Layer w10: R10.2 1300,3105 v2(1360,3105) ; v2(1885,3105) 1890,3100 2875,3100 v2(2930,3045) ; v2(2965,2080) 2970,2080 3260,1790 v2(3260,1550)
  Bottom Layer w10: v2(1360,3105) 1365,3100 1880,3100 v2(1885,3105) ; v2(2930,3045) 2930,2115 v2(2965,2080) ; v2(3260,1550) P2.3
NetP2_4: P2.4 R11.1 | length 1205.7
  Bottom Layer w10: v2(2680,1500) 3815,1500 P2.4
NetQ1_1: Q1.1 R8.2 R9.2 | length 363
  Top Layer w30: Q1.1 650,482.4 R9.2 R8.2
NetQ2_1: Q2.1 R15.2 | length 154.2
  Top Layer w20: R15.2 1010,3280 Q2.1
OSC_IN: C15.1 MCU.23 R12.2 Y1.2 | length 1472.4
  Top Layer w10: MCU.23 2176.1,2550 v1(2405,2550) ; v1(2410,2885) 2465,2885 ; R12.2 2495,2910 ; C15.1 2720,2857.64 Y1.2 2516.97,2813.03 2495,2835 2495,2860 ; 2465,2885 ccw(c2467.5,2912.5) 2470,2885 ; 2465,2885 2467.5,2885 ; 2467.5,2885 cw(c2468.75,2858.75) 2470,2885 ; 2467.5,2885 2470,2885 ; 2470,2885 ccw(c2467.5,2912.5) 2495,2910 ; 2470,2885 cw(c2468.75,2858.75) 2495,2860 ; 2470,2885 2495,2885 ; 2495,2860 2495,2885 ; 2495,2885 2495,2910
  Bottom Layer w10: v1(2405,2550) 2410,2555 v1(2410,2885)
OSC_OUT: C24.1 MCU.24 R12.1 Y1.1 | length 870.6
  Top Layer w10: MCU.24 2183.26,2585 v1(2260,2585) ; Y1.1 2262.01,2972.01 C24.1 R12.1
  Bottom Layer w10: v1(2260,2585) 2260,2810 v1(2265,2815)
PA0: LANYA.4 MCU.34 P2.11 | length 4621.7
  Top Layer w10: MCU.34 2024.87,2705 v2(3210,2705) 3205,2710 3205,3595 3390,3780 LANYA.4 ; v2(3565,1140) v2(3565,1810)
  Bottom Layer w10: v2(3210,2705) 3210,2120 3215,2115 3205,2105 3500,1810 v2(3565,1810) ; v2(3565,1140) 3565,1150 P2.11
PA1: LANYA.3 MCU.35 P2.12 | length 5892
  Top Layer w10: MCU.35 2042.03,2750 3035,2750 3155,2870 3155,3730 LANYA.3 ; v2(3660,1205) 3660,1675 3770,1785 3770,3095 v2(3710,3155)
  Bottom Layer w10: LANYA.3 3340,3915 3635,3915 3710,3840 v2(3710,3155) ; v2(3660,1205) 3810,1205 P2.12
PA2: FINGER.3 MCU.36 P2.13 | length 4732.7
  Top Layer w10: FINGER.3 845,2855 v2(1200,2855) ; v2(1785,2620.29) MCU.36 2039.19,2775 v2(2985,2775) ; v2(3180,1935) 3325,1935 3490,1770 3490,1050 v2(3485,1045)
  Bottom Layer w10: v2(1200,2855) 1550.29,2855 v2(1785,2620.29) ; v2(2985,2775) 2985,2140 2990,2135 2985,2130 v2(3180,1935) ; v2(3485,1045) 3490,1050 P2.13
PA3: FINGER.4 MCU.37 P2.14 | length 5758.2
  Top Layer w10: FINGER.4 v2(890,3035) ; v2(1050,3230) v2(1405,3230) ; MCU.37 1690,2576.1 1940,2826.1 v2(1936.1,2830) ; v2(1935,3150) 2915,3150 v2(3020,3045) ; v2(3310,1880) 3465,1725 v2(3465,1090)
  Bottom Layer w10: v2(890,3035) 890,3180 940,3230 v2(1050,3230) ; v2(1405,3230) 1405,3200 1450,3155 1930,3155 v2(1935,3150) 1935,2831.1 v2(1936.1,2830) ; v2(3020,3045) 3020,2170 v2(3310,1880) ; v2(3465,1090) 3825,1090 P2.14
PA4: MCU.40 RFID.1 | length 1756.6
  Top Layer w10: MCU.40 1585,2597.58 1585,2943.53 2486.47,3845 RFID.1
PA5: MCU.41 RFID.2 | length 1729.8
  Top Layer w10: MCU.41 1550,2604.74 1550,2970 RFID.2
PA6: MCU.42 RFID.4 | length 1667.5
  Top Layer w10: MCU.42 1535,2591.9 1535,3010 v2(1915,3390) ; v2(1915,3535) RFID.4
  Bottom Layer w10: v2(1915,3390) v2(1915,3535)
PA7: MCU.43 RFID.3 | length 1729.5
  Top Layer w10: MCU.43 1520,2579.07 1520,3040 RFID.3
PA8: MCU.100 R15.1 | length 2065.9
  Top Layer w10: R15.1 1005,3185 v2(1160,3185) ; MCU.100 1640,1624.16 v1(1640,1740)
  Bottom Layer w10: v2(1160,3185) 1165,3180 1165,2640 1372.32,2432.68 1374.64,2435 1395.36,2435 1410,2420.36 1410,2399.64 1407.68,2397.32 1645,2160 1645,1924.64 1640,1919.64 v1(1640,1740)
PA9: MCU.101 P2.17 | length 3614.1
  Top Layer w10: v2(1505,490) 1505,1461.32 MCU.101
  Bottom Layer w10: v2(1505,490) 3365,490 3370,495 3380,485 3475,580 3475,740 3585,850 P2.17
PA10: MCU.102 P2.18 | length 3683
  Top Layer w10: v2(1535,460) 1535,1463.48 MCU.102
  Bottom Layer w10: v2(1535,460) 3380,460 3495,575 3495,710 3570,785 3800,785 P2.18
PA13: MCU.105 R14.1 SWD.3 | length 3923.5
  Top Layer w10: MCU.105 1690,1534.96 1689.65,1535.32 v1(1689.65,1750) ; v1(2575,2415) 3155,2415 3330,2590 v1(3645,2590)
  Top Layer w30: R14.1@3580,3405 3820,3405 SWD.3
  Bottom Layer w10: v1@1690,1750 1700,1760 1730,1760 1785,1815 1785,2276.21 1923.79,2415 v1(2575,2415) ; v1(3580,3400) 3580,3335 3645,3270 v1(3645,2590)
PA14: MCU.109 R13.1 SWD.2 | length 3770.4
  Top Layer w10: v1(1710,1735) 1710,1515 v1(1725,1500) ; v1(1800,1500) 1805,1495 1805,1486.74 MCU.109 ; v1(2515,2380) 2517.95,2382.95 3182.95,2382.95 3365,2565 v1(3365,2570) ; v1(3580,3200) R13.1@3580,3280
  Top Layer w30: R13.1 3810,3285 SWD.2
  Bottom Layer w10: v1(1710,1735) 1735,1735 1810,1810 1810,2198.79 ; v1(1725,1500) v1(1800,1500) ; 1810,2200 1810,2280 1915,2385 2510,2385 v1(2515,2380) ; v1(3365,2570) 3365,3095 3470,3200 v1(3580,3200)
PA15: JP1.40 MCU.110 | length 2638.7
  Top Layer w10: JP1.40 190,2760 940,2760 1170,2530 v2(1220,2530) ; v2(1590,1890) 1600,1880 v1(1735,1880) v1(1735,1525) ; v1(1808.57,1525) 1820,1513.57 1820,1499.58 MCU.110
  Bottom Layer w10: v2(1220,2530) 1220,2515 1585,2150 1585,1895 v2(1590,1890) ; v1(1735,1525) v1(1808.57,1525) v1@1809.29,1524.29
PB0: JP1.34 MCU.46 | length 2638.6
  Top Layer w10: JP1.34 159.39,2490.61 179.39,2490.61 205,2465 v2(465,2465) ; v2(465,2935) 615,3085 v2(1210,3085) ; v2@1480,3135 v2(1480,3125) 1480,2535.55 MCU.46
  Bottom Layer w10: v2(465,2465) v2(465,2935) ; v2(1210,3085) 1235,3085 1280,3130 1475,3130 v2(1480,3125)
PB1: JP1.31 MCU.47 | length 2466.8
  Top Layer w10: JP1.31 215,2410 165,2460 95,2460 60,2495 60,2865 100,2905 495,2905 585,2815 1200,2815 v2(1205,2820) ; v2(1455,2820) 1456.36,2818.64 1456.36,2531.36 MCU.47
  Bottom Layer w10: v2(1205,2820) v2(1455,2820)
PB3: JP1.32 MCU.133 | length 2490.9
  Top Layer w10: JP1.32 185,2365 890,2365 990,2265 v2(985,2260) ; v1(1430,2155) 2110,2155 v2(2110,2160) ; v1(2110,1845) 2114.87,1845 MCU.133
  Bottom Layer w10: v2(985,2260) 1164.64,2260 1169.64,2255 1190.36,2255 1195.36,2260 1295,2260 1400,2155 v1(1430,2155) ; v1(2110,1845) v2(2110,2160)
PB4: JP1.36 MCU.134 | length 2601.9
  Top Layer w10: JP1.36 198.5,2551.5 873.5,2551.5 v2(875,2550) ; v2(1520,2125) v2(2060,2125) ; v2(2060,1885) 2102.71,1885 MCU.134
  Bottom Layer w10: v2(875,2550) 875,2410 910,2375 1275.36,2375 1520,2130.36 v2(1520,2125) ; v2(2060,1885) v2(2060,2125)
PB5: JP1.38 MCU.135 | length 2557.6
  Top Layer w10: JP1.38 190,2660 940,2660 v2(1110,2490) ; v2(1560,2070) v2(1995,2070) ; v2(1995,1910) 2105.55,1910 MCU.135
  Bottom Layer w10: v2(1110,2490) 1205,2490 1560,2135 v2(1560,2070) ; v2(1995,1910) v2(1995,2070)
PB6: JP1.39 MCU.136 | length 2521.8
  Top Layer w10: JP1.39 260,2790 954.64,2790 1179.64,2565 1230,2565 v2(1385,2410) ; v2(1610,1935) 2108.39,1935 MCU.136
  Bottom Layer w10: v2(1385,2410) 1385,2380 1610,2155 v2(1610,1935)
PB10: JP1.35 MCU.69 P2.15 | length 4932.5
  Top Layer w10: JP1.35 935,2610 1100,2445 v2(1100,2285) ; v2(1180,2280) 1185,2275 1185,2190.26 MCU.69 1335.26,2040 2670,2040 v2(2680,2050) ; v2(2760,1605) v2(2760,2050) ; v2(3335,1600) 3335,1174.93 3343.46,1166.47 3343.46,1066.54 3460,950 v2(3485,950)
  Bottom Layer w10: v2(1100,2285) 1175,2285 v2(1180,2280) ; v2(2680,2050) v2(2760,2050) ; v2(2760,1605) 2765,1600 v2(3335,1600) ; v2(3485,950) P2.15
PB11: JP1.37 MCU.70 P2.16 | length 5117.3
  Top Layer w10: JP1.37 930,2710 1025,2615 1025,2606.72 1036.72,2595 1045,2595 1155,2485 1155,2192.42 MCU.70 1352.42,1995 v2(2685,1995) ; v2(2810,1995) 2815,1990 v2(2815,1455) ; v2(3540,1000) v2(3540,1460)
  Bottom Layer w10: v2(2685,1995) v2(2810,1995) ; v2(2815,1455) 2820,1460 v2(3540,1460) ; v2(3540,1000) 3815,1000 P2.16
PB12: IC1.7 MCU.73 | length 895.7
  Top Layer w10: v2(550,2110) 659.64,2110 859.64,1910 1174.19,1910 MCU.73
  Bottom Layer w10: v2(550,2110) 550,2035 575,2010 IC1.7
PB13: IC1.6 MCU.74 | length 986.8
  Top Layer w10: v2(520,2080) 525,2075 655,2075 835,1895 1187.03,1895 MCU.74
  Bottom Layer w10: v2(520,2080) 520,1980 540,1960 IC1.6
PB14: IC1.5 MCU.75 | length 1075.7
  Top Layer w10: v2(475,2045) 650,2045 820,1875 1194.87,1875 MCU.75
  Bottom Layer w10: v2(475,2045) 475,1975 540,1910 IC1.5
PC1: A9G.3 MCU.27 | length 3166.8
  Top Layer w10: MCU.27 2169.74,2655 v2(2860,2655) ; v2(2855,1965) 2845,1965 3100,1710 v2(3100,830)
  Bottom Layer w10: v2(2855,1965) 2860,1970 v2(2860,2655) ; v2(3100,830) 3105,830 3195,740 A9G.3
PC4: MCU.44 RFID.7 | length 1592.7
  Top Layer w10: MCU.44 1495,2576.23 1495,3070 1865,3440 1865,3785 RFID.7
PC8: MCU.98 R5.1 sdcard1.7 | length 2524.1
  Top Layer w10: v2(1415,700) 1415,1454.84 MCU.98 ; v2(1625,700) 1627.36,702.36 v2(2562.64,702.36) ; R5.1 2470,385 2560,475 v2(2560,530)
  Bottom Layer w10: v2(1415,700) v2(1625,700) ; v2(2560,530) 2560,625.03 sdcard1.7 v2(2562.64,702.36)
PC13: JP1.33 MCU.7 | length 2283.8
  Top Layer w10: JP1.33 250,2500 v2(850,2500) ; v1(1470,2105) 1475,2100 2171.52,2100 MCU.7
  Bottom Layer w10: v2(850,2500) 855,2495 855,2385 890,2350 1265,2350 1470,2145 v1(1470,2105)
PD2: MCU.116 R3.1 sdcard1.3 | length 1111.1
  Top Layer w10: MCU.116 2359.94,1126.68 R3.1
  Bottom Layer w10: v2(2360,980) 2389.42,950.58 sdcard1.3
PD3: MCU.117 sdcard1.9 | length 1236.2
  Top Layer w10: MCU.117 2655,859.45 v2(2655,855)
  Bottom Layer w10: sdcard1.9 2652,852 v2(2655,855)
PF11: JP1.30 MCU.49 | length 2497.6
  Top Layer w10: JP1.30 198.5,2251.5 291.5,2251.5 325,2285 v2(325,2330) ; v2(1035,2970) 1040,2965 1365,2965 1390,2940 1390,2542.03 MCU.49
  Bottom Layer w10: v2(325,2330) 325,2830.36 464.64,2970 v2(1035,2970)
PG9: A9G.4 MCU.124 P3.1 | length 2424
  Top Layer w10: MCU.124 2774.32,935 v2(3060,935) ; A9G.4 3365,775 v2(3365,410)
  Bottom Layer w10: v2(3060,935) 3155,840 A9G.4 ; P3.1 3115,160 v2(3365,410)
PG14: A9G.5 MCU.129 P3.2 | length 2432.3
  Top Layer w10: MCU.129 2858.52,990 v2(3060,990) ; A9G.5 3395,845 v2(3395,380)
  Bottom Layer w10: v2(3060,990) 3115,935 3300,935 A9G.5 ; P3.2 3215,200 v2(3395,380)
RESET: C27.2 JP1.5 MCU.25 R16.1 RST.1 | length 5076.9
  Top Layer w10: JP1.5 255,1110 270,1095 v1(1355,1095) ; v1(1750,1465) 1765,1480 v1(1765,1725) ; v1(1840.42,2270) MCU.25 2200.42,2630 3670.91,2630 RST.1@3705,2664.09
  Top Layer w40: R16.1 3582.5,2782.5 C27.2 3582.56,2920 3705,2920 RST.1@3705,2664.09
  Bottom Layer w10: v1(1355,1095) 1385.36,1095 1750,1459.64 v1(1750,1465) ; v1(1765,1725) 1790,1725 1835,1770 1835,2264.58 v1(1840.42,2270)
SDIO_D1: MCU.99 R6.1 sdcard1.8 | length 2426.6
  Top Layer w10: v2(1465,745) 1465,1477 MCU.99 ; v2(1565,740) 1565.95,739.05 v2(2605.95,739.05) ; R6.1 2570,385 2610,425 v2(2610,560)
  Bottom Layer w10: v2(1465,745) 1470,740 v2(1565,740) ; v2(2605.95,739.05) sdcard1.8 2610,623.62 v2(2610,560)
SDIO_D2: MCU.111 R1.1 sdcard1.1 | length 1575.3
  Top Layer w10: MCU.111 2305,1042.42 v1(2305,970) ; R1.1 1999.94,509.94 2032.5,542.5 2030,545 2300,545 v2(2302.8,542.2)
  Bottom Layer w10: v2(2302.8,542.2) sdcard1.1 2302.8,967.8 v1(2305,970)
SDIO_D3: R2.1 sdcard1.2 | length 289
  Top Layer w20: R2.1 2230,780 v2(2345,780)
  Bottom Layer w20: v2(2345,780) 2345,628.78 sdcard1.2
SDIO_SCK: MCU.113 R4.1 sdcard1.5 | length 1692.5
  Top Layer w10: MCU.113 2325,1078.1 v2(2325,1075) ; R4.1 v2(2135,520) v2(2135,520)
  Bottom Layer w10: v2(2135,520) 2137.8,517.2 2437.2,517.2 2475,555 2475,626.64 sdcard1.5 2476.03,923.97 v2(2325,1075)
VBAT: D3.2 IC1.8 MCU.6 | length 3768.3
  Top Layer w10: v2(980,2150) 1095,2150 1280,1965 v2(2175,1965) ; v2(2174.36,2075) MCU.6
  Top Layer w40: v2(850,590) D3.2
  Bottom Layer w10: IC1.8 605,2110 640,2145 975,2145 v2(980,2150) ; v2(2174.36,2075) 2175,2074.36 v2(2175,1965)
  Bottom Layer w40: IC1.8 670,2060 690,2040 690,1600 850,1440 v2(850,590)
VCC3.3: BEEP1.1 C1.2 C9.2 C10.2 C11.1 C16.2 C17.2 C18.2 C19.2 C20.2 C21.2 C22.2 C23.2 IC1.1 JP1.24 JP1.25 LANYA.1 MCU.17 MCU.30 MCU.33 MCU.39 MCU.52 MCU.62 MCU.72 MCU.84 MCU.95 MCU.108 MCU.121 MCU.131 MCU.144 P2.1 P2.2 R1.2 R2.2 R3.2 R4.2 R5.2 R6.2 R13.2 R14.2 R16.2 R17.1 R18.1 R19.1 RFID.8 sdcard1.4 U2.2 | length 21634.7
  Top Layer w10: v1(755,2235) 845,2235 ; 815,2205 cw(c847.5,2202.5) 845,2235 ; v1(1045,2615) 1050,2610 1060,2610 1180,2490 1180,2345 1215,2310 1260.13,2310 MCU.62 ; v1(1075,1685) 1255.42,1685 MCU.84 ; v1(1130,2660) 1165,2660 ; 1140,2685 ccw(c1172.5,2692.5) 1165,2660 ; MCU.72 1056.74,2235 850,2235 ; C20.2@1210,1280 C20.2 1260,1230 1345,1230 1400,1285 1400,1523.35 MCU.95 ; MCU.52 1188.52,2660 1165,2660 ; v1(1607.5,2727.5) 1605,2725 1605,2605.42 MCU.39 1730.42,2480 1827.71,2480 MCU.33 2012.71,2665 v1(2015,2665) ; MCU.108 1840,1312.55 C19.2 v1(1845,1235) ; MCU.30 1971.23,2540 v1(2020,2540) ; MCU.121 v1(2140.81,1485) ; MCU.17 v1@2236.57,2443.43 ; MCU.131 2199.6,1704.6 2200,1705 v1(2360,1705) ; MCU.144 2376.1,1890 v1(2455,1890) ; 845,2235 cw(c847.5,2202.5) 850,2235 ; 845,2235 850,2235
  Top Layer w30: BEEP1.1 355,195 1815,195 1915,295 R1.2 R4.2 C1.2 R5.2 R6.2 2720,295 2785,360 R19.1 R17.1 v2(2785,747.44) 2717.44,815 2439.94,815 v2@2433.72,821.22 ; v1(755,2055) v1(755,2235) ; v1(1005,1280) C20.2@1210,1280 ; v1(1130,2660) 1130,2710 v1(1200,2780) ; RFID.8 1880,3900 3055,3900 LANYA.1 ; C19.2 1840,1105 2060,885 R2.2 2225,895 R3.2 v2@2433.72,821.22 ; v1(2360,1600) v1(2360,1705) ; v1(2365,2320) 2360,2320 2236.57,2443.43 2273.13,2480 2425,2480 C16.2 ; v2(2432.72,820.22) v2@2433.72,821.22 ; v1(2455,1890) 2580,1890 2670,1800 C17.2 ; v2(3360,3400) 3480,3400 R14.2 3485,3290 R13.2 3490,2780 R16.2 3495,2760 v1(3580,2675)
  Bottom Layer w10: C21.2 1010,1620 v1(1075,1685) ; C23.2 1507.5,2727.5 v1(1607.5,2727.5) ; 2045,2540 2050,2540 ; v1(2140.81,1485) v1@2140.81,1485.81
  Bottom Layer w30: JP1.24 JP1.25 410,2110 C11.1@465,2165 ; C11.1 529.94,2235 v1(755,2235) 755,2595 840,2680 965,2680 C22.2 1105,2610 1130,2635 v1(1130,2660) ; IC1.1@806.69,2060 760,2060 755.61,2054.51 753.66,2052.07 740,2035 740,1913.49 774.32,1879.17 775.83,1879.17 855,1800 855,1770 C21.2 v1(1005,1280) ; v1(1200,2780) 1455,2780 C23.2 ; v1(1845,1235) 1890.81,1235 v1(2140.81,1485) ; v1(2015,2665) 2015,2590 ; 2045,2540 v1(2020,2540) 2015,2545 2015,2590 ; 2050,2540 2065,2540 ; v1@2140.81,1485.81 2255,1600 v1(2360,1600) ; v1(2235,2445) 2140,2540 2075,2540 ; v1(2360,1705) 2380,1705 2455,1780 v1(2455,1890) 2455,2225 2365,2315 v1(2365,2320) ; sdcard1.4 v2(2432.72,820.22) ; v2(2670,1650) 3695,1650 ; v2(2785,747.44) 2835,797.44 2835,855 2889.72,909.72 C10.2@2895,904.44 ; C9.2 2999.5,899.5 C10.2 C10.2@2895,904.44 ; LANYA.1 3090,3480 3170,3400 v2(3360,3400) ; C18.2 3155,1130 3120,1165 2920,1165 2895,1140 U2.2 C10.2@2895,904.44 ; v1(3580,2675) 3600,2655 3600,2550 3765,2385 3765,1720 ; 3765,1725 cw(c3692.5,1722.5) 3765,1720 ; 2015,2590 ccw(c2070,2595) 2065,2540 ; 2065,2540 ccw(c2070,2595) 2075,2540 ; 2065,2540 2075,2540 ; 3695,1650 ccw(c3692.5,1722.5) 3765,1720 ; 3695,1650 P2.1 ; P2.1 3835,1650 ; P2.1 3765,1720 ; 3765,1720 ccw(c3850,1735) 3835,1650 ; 3835,1650 ccw(c3850,1735) P2.2 3835,1650
VCC4.0: P2.9 P2.10 | length 100
  Top Layer w50: P2.9 P2.10
VCC5: A9G.1 C4.1 C5.2 C6.2 C7.1 C8.1 C12.2 FINGER.6 JP1.28 L1.2 LED1.1 P2.7 P2.8 U1.4 U2.3 | length 8909.6
  Bottom Layer w10: JP1.28 198.5,2268.5 311.14,2268.5 314.64,2265 435,2265 C12.2
  Bottom Layer w20: C8.1 2778.09,1080 U2.3 U2.3@2790,1052.03 ; C7.1@2788.03,903.97 C7.1 ; P2.8@3860,1345 P2.8
  Bottom Layer w30: C12.2@480,2300 470,2310 470,2415 845,2790 970,2790 FINGER.6 1090,3360 1317.99,3587.99 L1.2@1982.99,3587.99 ; 2598.11,3035 ccw(c2584.06,2965.94) 2570,3035 cw(c2572.5,2972.5) 2575,3035 cw(c2572.5,2972.5) 2635,2975 ; 2645,3035 2635,3025 2635,2975 ; C8.1 2635,1098.11 2635,2975 ; 2700,3035 ccw(c2697.5,2972.5) 2695,3035 ccw(c2697.5,2972.5) 2635,2975 ; 2708.11,3035 cw(c2714.06,2974.06) 2720,3035 ; C7.1 U2.3@2790,1052.03 ; U2.3 2798.03,1143.03 2860,1205 3375,1205 ; A9G.1 3350,540 3430,620 3430,1140 ; P2.8@3860,1345 3505,1345 3430,1270 ; 3375,1205 ccw(c3370,1265) 3430,1260 ; 3375,1205 cw(c3370,1145) 3430,1150 ; 3375,1205 3430,1205 ; 3430,1140 ccw(c3370,1145) 3430,1150 ; 3430,1140 3430,1150 ; 3430,1150 3430,1205 ; 3430,1205 3430,1260 ; 3430,1260 ccw(c3370,1265) 3430,1270 ; 3430,1260 3430,1270
  Bottom Layer w40: L1.2@1982.99,3587.99 2195,3587.99 2200,3582.99 LED1.1 C6.2 2200,3275 C5.2 2210,3200 2375,3035 2465,3035 ; C4.1 2465,3035 ; U1.4 2763.07,3078.07 2720,3035 2708.11,3035 2695,3035 2645,3035 2598.11,3035 2575,3035 2570,3035 2465,3035
VCC12: C2.1 C3.2 D4.2 DOOR.1 JK1.1 JK1.4 S1.2 U1.1 | length 6164.3
  Top Layer w50: JK1.1 432.48,3325 ; JK1.4 432.48,3671.1 432.48,3525 ; DOOR.1 1130,3590 975,3435 810,3435 D4.2 550,3425 ; 432.48,3325 cw(c536.86,3320.62) 532.48,3425 ; 432.48,3325 432.48,3435 ; 432.48,3435 432.48,3525 ; 432.48,3435 442.48,3425 532.48,3425 ; 432.48,3525 ccw(c541.24,3533.76) 532.48,3425 ; 532.48,3425 cw(c536.86,3320.62) 541.24,3425 ; 532.48,3425 ccw(c541.24,3533.76) 550,3425 ; 532.48,3425 541.24,3425 ; 541.24,3425 550,3425
  Bottom Layer w50: DOOR.1 1306.54,3781.54 2552.76,3781.54 2594.29,3740 2594.29,3624.29 2580,3610 C3.2 2525,3410 2635,3300 2895,3300 2963.86,3231.14 U1.1 ; U1.1@2970,3155 3133.15,3155 3285,3003.15 C2.1 3285,2130 ; 3290,2120 3485,1925 S1.2
pads on no net: FINGER.1 FINGER.2 LANYA.5 LANYA.6 MCU.8 MCU.9 MCU.10 MCU.11 MCU.12 MCU.13 MCU.14 MCU.15 MCU.18 MCU.19 MCU.21 MCU.22 MCU.26 MCU.28 MCU.29 MCU.45 MCU.53 MCU.54 MCU.55 MCU.56 MCU.57 MCU.80 MCU.81 MCU.82 MCU.87 MCU.88 MCU.89 MCU.90 MCU.91 MCU.92 MCU.93 MCU.96 MCU.97 MCU.103 MCU.104 MCU.112 MCU.122 MCU.123 MCU.125 MCU.126 MCU.128 MCU.132 MCU.137 MCU.139 MCU.140 MCU.141 MCU.142 MCU.143 RFID.5 S1.3 S1.4 S1.5 S1.6 sdcard1.10 sdcard1.11 sdcard1.12 sdcard1.13 U2.4 Y2.

## Other copper
Top Layer:
  pour cut-out: 1060,2015 1765,2720 1790,2720 2495,2015 1765,1285 1760,1285
Bottom Layer:
  pour cut-out: 1060,2015 1775,2730 2495,2010 2485,2010 1760,1285

## Silkscreen, mask and mechanical layers (free items; w line width, h text height)
Top Overlay:
  text "VCC3.3" at 1685,3720 h50
  text "SDA" at 2470,3715 h50
  text "VCC3.3" at 2950,3710 h50
  text "DIO" at 3745,3435 h50 r90
  text "CLK" at 3745,3230 h50 r90
  text "GND" at 3740,3045 h50 r90
  text "VCV3.3 VCC3.3" at 3300,1620 h32
  text "BOOT1 POOT0" at 3360,1535 h32
  text "GND GND" at 3445,1435 h32
  text "VCC5 VCC5" at 3405,1335 h32
  text "VCC4 VCC4" at 3405,1250 h32
  text "TX4 RX4" at 3460,1130 h32
  text "RX2 TX2" at 3470,1035 h32
  text "TX3 RX3" at 3465,935 h32
  text "TX1 RX1" at 3485,835 h32
  text "RXD6 TXD6 HST_RX HST_DX" at 2880,30 h35
Mechanical 13:
  the board outline again, w7.87

## Text inside footprints (layer, text, board x,y; h text height)
U2: Bottom Overlay "3" at 2821,1233 h50; Bottom Overlay "1" at 3001,1233 h50